# EAGLE board LED_eyeSocket (EAGLE 7.3.0)
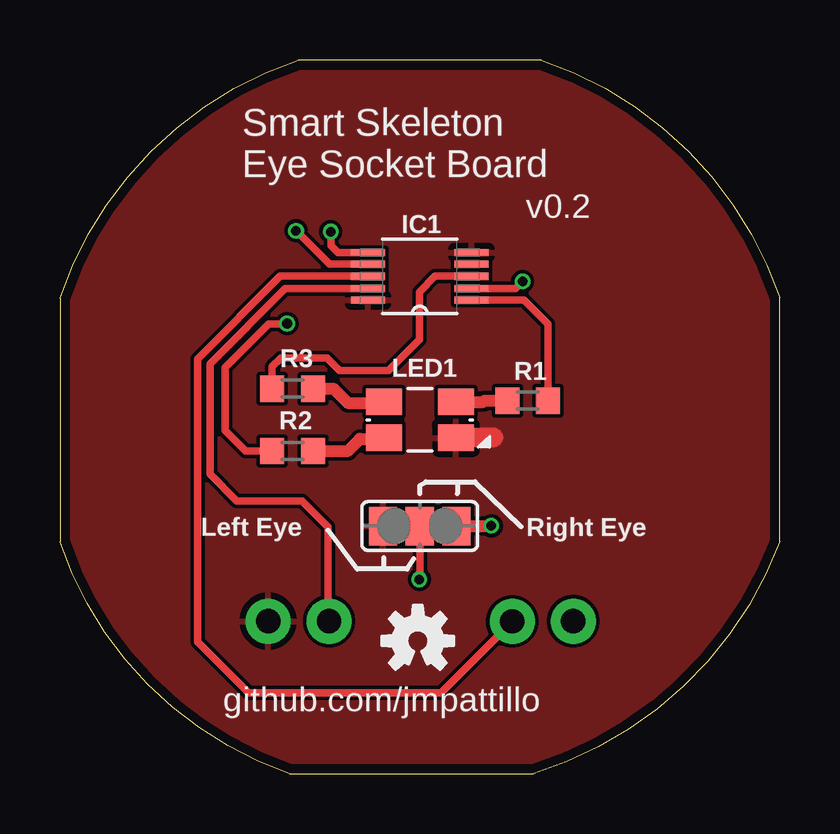
[diagram p0: board, top side]
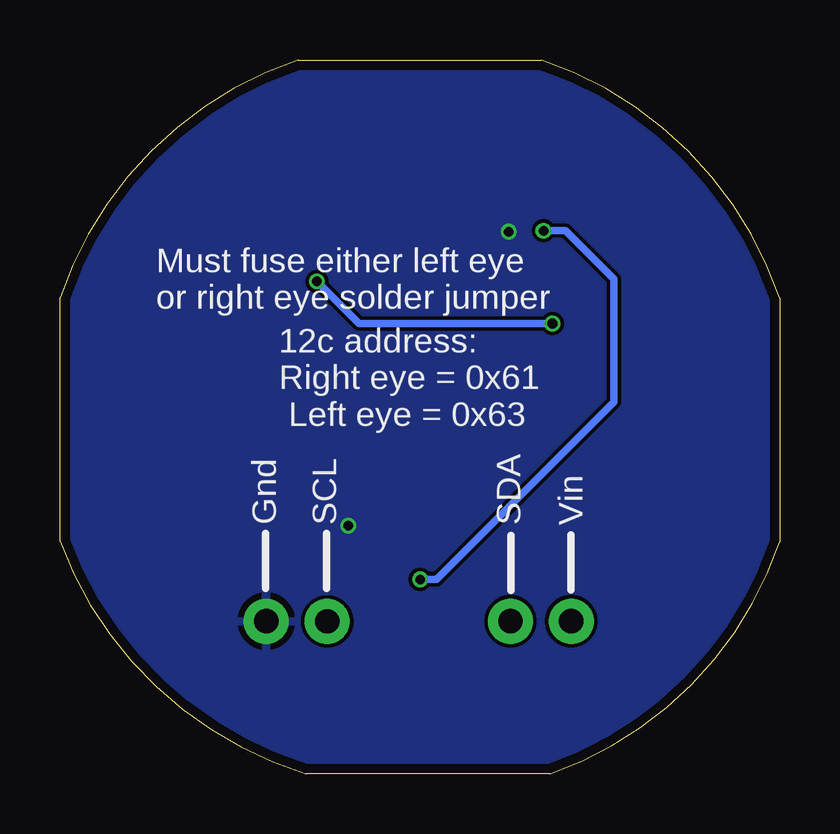
[diagram p1: board, bottom side, seen from below]

Size 30 x 29.75 mm. Coordinates in mm from the lower left corner, seen from the top.
Outline: 9.58,0 19.74,0 arc53 30,9.67 30,19.84 arc53 20.08,29.75 9.92,29.75 arc53 0,19.83 0,9.66 arc53 9.58,0
Copper layers (1*16): Top 0.035559375mm / dielectric 1.6mm / Bottom 0.035559375mm
Design rules "oshpark-2layer": minimum track width 6mil, minimum drill 10mil, track to track 6mil, track to pad 6mil, pad to pad 6mil, via to via 6mil, smd to smd 6mil, copper to edge 15mil, drill to drill 6mil, minimum pad ring 5mil, minimum via ring 5mil, stop-mask expansion 2.5mil, vias tented up to drill 0mil, thermal gap 10mil

## Footprints (pad centres in the part's own frame; a part is rotated, then mirrored left to right if it is on the bottom)
SOP50P490X110-10N = smd 1.422 x 0.305: 1 -2.159,0.991; 2 -2.159,0.508; 3 -2.159,0; 4 -2.159,-0.508; 5 -2.159,-0.991; 6 2.159,-0.991; 7 2.159,-0.508; 8 2.159,0; 9 2.159,0.508; 10 2.159,0.991
1X01NS-KIT = drill 1.016 pad 1.88: 1 0,0
PAD-JUMPER-3-NO_YES_SILK_FULL_BOX = smd 1.168 x 1.6: 1 -1.524,0; 2 0,0; 3 1.524,0
R0603 = smd 1 x 1.1: 1 -0.85,0; 2 0.85,0
LED-TRICOLOR-PLCC = smd 1.5 x 1.1: PAD1 1.5,-0.75; PAD2 -1.5,-0.75; PAD3 -1.5,0.75; PAD4 1.5,0.75

## Placement (x,y rotation side)
IC1  PCA9632DP2,118  [SOP50P490X110-10N]  15,20.73 180 top
J1  [1X01NS-KIT]  8.68,6.35 0 top
J2  [1X01NS-KIT]  21.4,6.35 0 top
J3  [1X01NS-KIT]  11.22,6.35 0 top
J4  [1X01NS-KIT]  18.86,6.34 0 top
JP6  JUMPER-PAD-3-NOFULL_BOX_SILK  [PAD-JUMPER-3-NO_YES_SILK_FULL_BOX]  15,10.32 0 top
LOGO1  OSHW-LOGOS  [OSHW-LOGO-S]  14.92,5.53 0 top
R1  [R0603]  19.5,15.55 180 top
R2  [R0603]  9.7,13.45 0 top
R3  [R0603]  9.7,16.05 0 top
U$1  LED-TRICOLORPLCC  [LED-TRICOLOR-PLCC]  15,14.75 0 top

## Library data of the parts
IC1 = NXP_By_element14_Batch_1; MPN: PCA9632DP2,118; OC_FARNELL: 1867849; OC_NEWARK: 70R6723; PACKAGE: TSSOP-10; SUPPLIER: NXP
J1-J4 = SparkFun-Connectors
JP6 = SparkFun-Passives
LOGO1 = SparkFun-Aesthetics
R1-R3 = adafruit
U$1 = SparkFun-LED

## Nets
A1: IC1.7 JP6.2
BLU: IC1.2 R2.1
GND: IC1.6 J2.1 JP6.3
GRN: IC1.3 R3.1
N$1: R1.2 U$1.PAD4
N$2: R2.2 U$1.PAD2
N$3: R3.2 U$1.PAD3
RED: IC1.1 R1.1
SCL: IC1.8 J4.1
SDA: IC1.9 J3.1
VCC: IC1.5 IC1.10 J1.1 JP6.1 U$1.PAD1

## Tracks (layer width: path | path; a pad name or v marks a point on that pad's centre or on a via)
A1  (via drill 0.4)
  Top 0.305: IC1.7 11.23,21.24 v9.84,22.63 | JP6.2 15,8.11 v14.98,8.09
  Bottom 0.305: v9.84,22.63 8.93,22.63 6.91,20.61 6.91,15.49 14.31,8.09 v14.98,8.09
BLU  (via drill 0.4)
  Top 0.305: R2.1 7.73,13.45 6.88,14.3 6.88,16.93 8.69,18.74 9.45,18.74 v9.47,18.76 | IC1.2 18.99,20.22 v19.29,20.52
  Bottom 0.305: v9.47,18.76 17.53,18.76 v19.29,20.52
GND  (via drill 0.4)
  Top 0.305: IC1.6 11.6,21.72 11.3,22.02 v11.3,22.58 v11.29,22.59
  Top 0.508: JP6.3 v17.98,10.33
  pour Bottom: 0,29.75 30,29.75 30,-0.25 0,-0.25 0,29.65
GRN
  Top 0.305: R3.1 8.85,16.96 9.22,17.33 11.13,17.33 11.66,16.8 13.7,16.8 14.99,18.09 14.99,20.08 15.64,20.73 IC1.3
N$1
  Top 0.508: U$1.PAD4 17.65,15.5 17.7,15.55 R1.2
N$2
  Top 0.508: R2.2 12,13.45 12.5,13.95 13.45,13.95 U$1.PAD2
N$3
  Top 0.508: R3.2 11.4,16.05 12,15.45 13.45,15.45 U$1.PAD3
RED
  Top 0.305: R1.1 20.35,17.14 20.34,17.15 20.34,18.74 19.34,19.74 IC1.1
SCL
  Top 0.305: IC1.8 9.17,20.73 5.73,17.29 5.73,5.49 7.86,3.36 15.88,3.36 J4.1
SDA
  Top 0.305: IC1.9 9.39,20.22 6.25,17.08 6.25,12.48 7.36,11.37 10.1,11.37 11.18,10.29 11.18,6.39 J3.1
VCC
  Top 0.813: 16.8,14.01 18.07,14.01
  pour Top: 0,29.75 30,29.75 30,-0.25 0,-0.25

## Text on the board
tPlace: Smart Skeleton / Eye Socket Board | v0.2 | LED1 | Left Eye | Right Eye | github.com/jmpattillo
bPlace: Must fuse either left eye / or right eye solder jumper | 12c address: / Right eye = 0x61 / Left eye = 0x63 | Vin | SDA | SCL | Gnd